# Altium PCB PCB1.PcbDoc
Units mm, origin at the board's own origin, x right, y up, seen from the top; angles counter-clockwise.
Board outline 102.72 x 28.35 mm, 2 copper layers (Top Layer, Bottom Layer), stack 0.533 mm thick; 35 components, 16 nets, 105 pads, 228 vias.
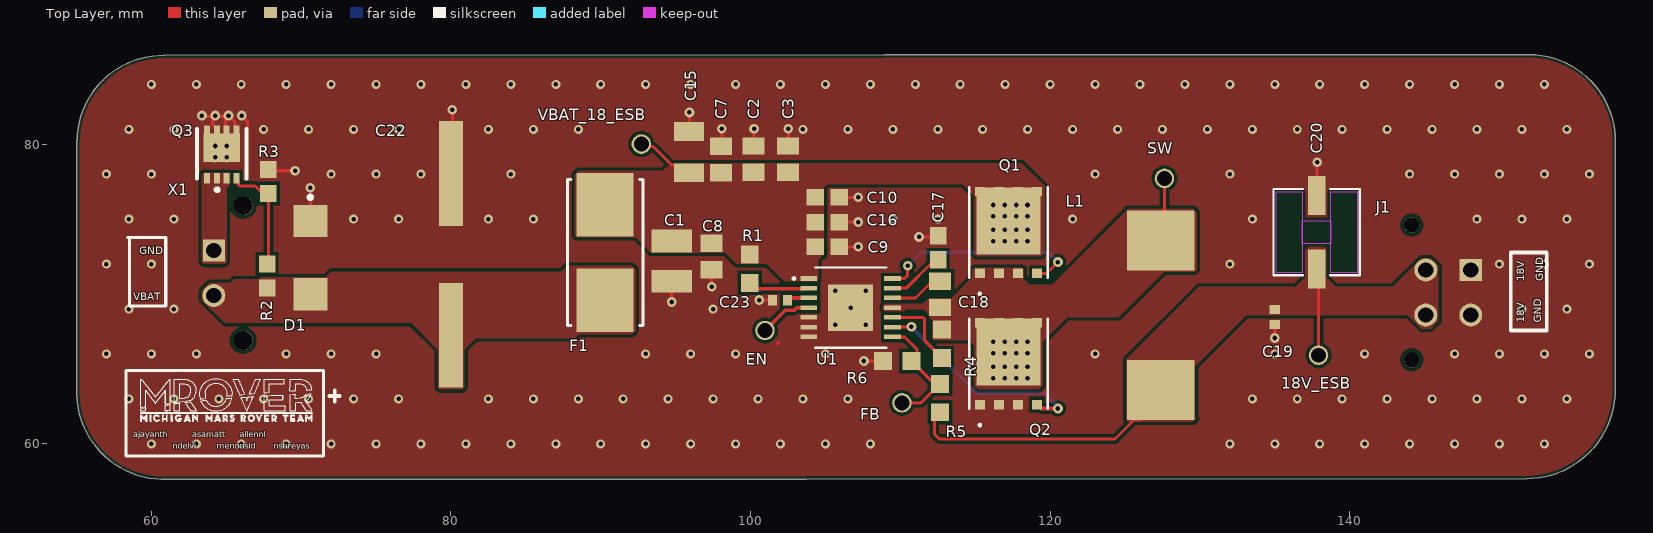
[diagram p0: Top Layer view]
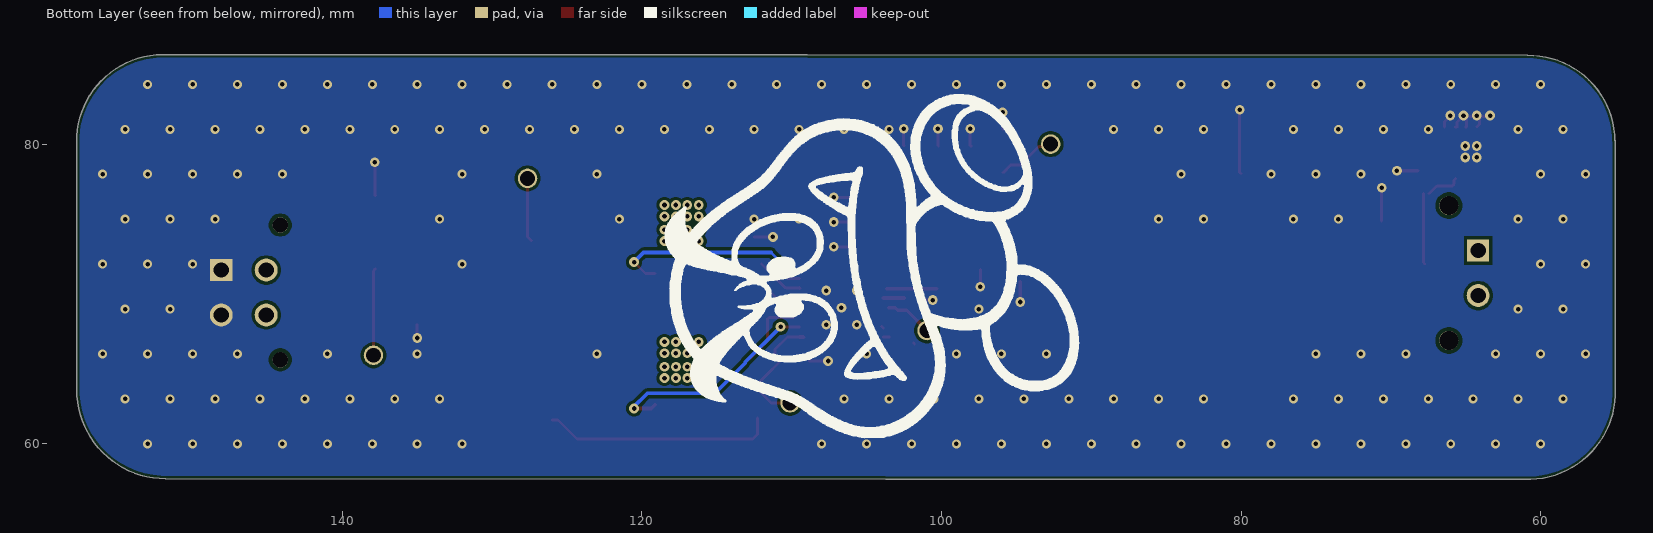
[diagram p1: Bottom Layer view, seen from below]

## Layer stack, top to bottom
Top Solder: solder mask 0.0102, Solder Resist, Dk 3.5
Top Layer: signal copper 0.0356
Dielectric 2: prepreg 0.0711, PP-006, Dk 4.1
Dielectric 1: dielectric 0.32, FR-4, Dk 4.8
Dielectric 3: prepreg 0.0711, PP-006, Dk 4.1
Bottom Layer: signal copper 0.0356
Bottom Solder: solder mask 0.0102, Solder Resist, Dk 3.5

## Board outline
60.664,57.625 cw(c60.853,63.464) 55.015,63.652 55.014,63.65 55.014,80.268 55.035,80.221 cw(c60.813,80.157) 60.876,85.935 108.966,85.979 152.019,85.979 cw(c151.956,80.2) 157.734,80.137 157.734,63.627 cw(c151.787,63.619) 151.794,57.672 151.816,57.67 103.726,57.626

## Design rules (kind name [scope] priority, off if disabled: settings)
BoardOutlineClearance [All] p1: gap=0.2 ignorepadtopadclearanceinfootprint=FALSE
Clearance "Stitching PGND_3" [IsStitchingVia and InNet('PGND') vs InNet('18V_ESB') or InNet('VBAT_18V_ESB') or InNet('VBAT_18_ESB') or InNet('SW')] p1: gap=0.2 ignorepadtopadclearanceinfootprint=FALSE
Clearance "Stitching PGND_2" [IsStitchingVia and InNet('PGND') vs InNet('18V_ESB') or InNet('VBAT_18V_ESB') or InNet('VBAT_18_ESB') or InNet('SW')] p2: gap=0.2 ignorepadtopadclearanceinfootprint=FALSE
Clearance "Stitching PGND_1" [IsStitchingVia and InNet('PGND') vs InNet('18V_ESB') or InNet('VBAT_18V_ESB') or InNet('VBAT_18_ESB') or InNet('SW')] p3: gap=0.2 ignorepadtopadclearanceinfootprint=FALSE
Clearance "Stitching PGND" [IsStitchingVia and InNet('PGND') vs InNet('18V_ESB') or InNet('VBAT_18V_ESB') or InNet('VBAT_18_ESB') or InNet('SW')] p4: gap=0.2 ignorepadtopadclearanceinfootprint=FALSE
Clearance "Stitching No Net_3" [IsStitchingVia and InNet('No Net') vs InNet('18V_ESB') or InNet('VBAT_18V_ESB') or InNet('VBAT_18_ESB') or InNet('SW')] p5: gap=0.2 ignorepadtopadclearanceinfootprint=FALSE
Clearance "Stitching No Net_2" [IsStitchingVia and InNet('No Net') vs InNet('18V_ESB') or InNet('VBAT_18V_ESB') or InNet('VBAT_18_ESB') or InNet('SW')] p6: gap=0.2 ignorepadtopadclearanceinfootprint=FALSE
Clearance "Stitching No Net_1" [IsStitchingVia and InNet('No Net') vs (IsVia and (Not IsStitchingVia)) Or IsPad] p7: gap=0.127 ignorepadtopadclearanceinfootprint=FALSE
Clearance "Stitching No Net" [IsStitchingVia and InNet('No Net') vs InNet('18V_ESB') or InNet('VBAT_18V_ESB') or InNet('VBAT_18_ESB')] p8: gap=0.2 ignorepadtopadclearanceinfootprint=FALSE
Clearance [All] p9: gap=0.203 ignorepadtopadclearanceinfootprint=FALSE except(0.25: Arc-Hole Track-Hole SMDPad-Hole THPad-Hole Via-Hole Fill-Hole Poly-Hole Region-Hole Text-Hole)
ComponentClearance [All] p1: gap=0.127 collisioncheckmode=3 verticalgap=0.127 showdistances=TRUE
DiffPairsRouting [All] p1: maxlimit=0.381 minlimit=0.203 mostfreqgap=0.203 toplayer_minwidth=0.203 toplayer_maxwidth=25.4 toplayer_prefwidth=0.203 bottomlayer_minwidth=0.203 bottomlayer_maxwidth=25.4 bottomlayer_prefwidth=0.203 maxuncoupledlength=12.7
Height [All] p1: minheight=0 maxheight=1816.048 prefheight=12.7
HoleSize [All] p1: absolutevalues=TRUE maxlimit=6.3 minlimit=0.3 maxpercent=80.000 minpercent=20.000
HoleToHoleClearance [All] p1: gap=0.25 allowstackedmicrovias=FALSE
MinimumAnnularRing [All] p1: minimumring=0.076
MinimumSolderMaskSliver [All] p1: minsoldermaskwidth=0
PlaneClearance [All] p1: clearance=0.203
PlaneConnect PlaneConnectPowerPads [InPadClass('PowerPads')] p1: planeconnectstyle=Direct reliefexpansion=0.508 reliefentries=4 reliefconductorwidth=0.254 reliefairgap=0.254
PlaneConnect [All] p2: pad.planeconnectstyle=Relief pad.reliefexpansion=0.3 pad.reliefentries=4 pad.reliefconductorwidth=0.203 pad.reliefairgap=0.203 via.planeconnectstyle=Direct via.reliefexpansion=0.3 via.reliefentries=4 via.reliefconductorwidth=0.127 via.reliefairgap=0.127
PolygonConnect PolygonConnectPowerPads [All vs (InPadClass('PowerPads'))] p1: connectstyle=Direct reliefconductorwidth=0.254 reliefentries=4 polygonreliefangle="90 Angle" airgapwidth=0.254
PolygonConnect [All] p2: connectstyle=Direct reliefconductorwidth=0.203 reliefentries=4 polygonreliefangle="90 Angle" airgapwidth=0.203
RoutingVias [All] p1: holewidth=0.3 width=0.6 viastyle="Through Hole" minholewidth=0.3 minwidth=0.6 maxholewidth=0.6 maxwidth=6.6
SilkToSilkClearance [All] p1: silktosilkclearance=0
SilkToSolderMaskClearance [IsPad] p1: minsilkscreentomaskgap=0.127 clearancetoexposedcopper=TRUE
SolderMaskExpansion [All] p1: expansion=0.075 istentingtop=FALSE
Width [All] p1: maxlimit=25.4 minlimit=0.203 preferedwidth=0.203 minimp=50.000000 maximp=50.000000 favimp=50.000000
20 further rules are at their usual default settings.

## Components (designator, comment, footprint, x,y, rotation, side; value= is the part's Value field where it differs from the comment)
18V_ESB "5003" TEST-POINT-0001 137.922,65.913 r0 top (schematic designator TP1)
C1 "CL32B106KBJNNNE" CAP-1210 94.742,72.192 r90 top
C2 "CC0805KKX7R9BB105" CAP-0805 100.203,79.003 r270 top
C3 "CC0805KRX7R9BB104" CAP-0805 102.489,79.003 r270 top
C7 "GRM2195C1H103JA01D" CAP-0805 98.022,78.985 r270 top
C8 "CDR01BX102BKUS7185" CAP-0805 97.409,72.508 r90 top
C9 "0603N101J101CT" CAP-0603 105.118,73.152 r180 top
C10 "0603N100J500CT" CAP-0603 105.118,76.454 r180 top
C15 "CL31B106KBHNNNE" CAP-1206 95.885,79.48 r90 top
C16 "CC0603KRX7R0BB104" CAP-0603 105.118,74.803 r0 top
C17 "UMK107BBJ225KA-T" CAP-0603 112.522,73.089 r90 top
C18 "KAM21KR72A474KL" CAP-0805 112.649,69.977 r90 top
C19 "0402B101K500NT" CAP-0402 135.001,68.461 r270 top
C20 "EEE-FK1H100UR" ELEC-10UF 137.946,73.877 r90 top
C22 "100SEV100M12.5X16" ELEC-100U-0001 80.01,72.644 r180 top
C23 "CC0402JRX7R9BB153" CAP-0402 101.981,69.596 r180 top
D1 "SMBJ40CA" "DO-214AA (SMBJ)" 70.612,72.39 r90 top
EN "5003" TEST-POINT-0001 100.965,67.564 r0 top (schematic designator TP5)
F1 "01550900M" FUSE-0001 90.297,72.771 r90 top
FB "5003" TEST-POINT-0001 110.109,62.738 r0 top (schematic designator TP3)
J1 "Molex 43045-0412" CONN-4POS-0002 148.082,70.104 r90 top
L1 "SRP1270-100M" PWRIND-10U-0002 127.381,68.58 r270 top
Q1 "CSD18563Q5A" 8-VSONP 117.221,74.109 r90 top
Q2 "CSD19534Q5A" 8-VSONP 117.221,65.346 r90 top
Q3 "CSD18543Q3AT" IC-8VSONCLIP 62.862,76.839 r0 top
R1 "RC0805FR-07274KL" RES-0805 99.949,71.689 r90 top
R2 "RC0603FR-07200KL" RES-0603 67.727,71.209 r90 top
R3 "RC0603FR-07100KL" RES-0603 67.818,77.508 r90 top
R4 "RC0805FR-071K18L" RES-0805 112.776,66.675 r90 top
R5 "RC0805FR-07287KL" RES-0805 112.649,63.058 r270 top
R6 "RC0805FR-079K76L" RES-0805 109.794,65.53 r0 top
SW "5003" TEST-POINT-0001 127.635,77.724 r0 top (schematic designator TP4)
U1 "LM3150" IC-14HTSSOP 106.68,69.088 r0 top
VBAT_18_ESB "5003" TEST-POINT-0001 92.71,80.01 r0 top (schematic designator TP2)
X1 "Molex 43650-0215" 43650-0215 64.171,71.402 r90 top

## Footprints (in the part's own frame and the unit in brackets; to place one, negate y for a bottom-side part, rotate by r counter-clockwise, add the part's x,y. Pads: shape width x height; smd on the part's side, far side on the other; paste and mask are expansions set on the pad)
8-VSONP [mm]
  rect 0.63x0.65 smd paste-0.1 mask-0.33: 1(-2.735,-1.905) 2(-2.735,-0.635) 2(-2.735,0.635) 2(-2.735,1.905) 3(2.735,-1.905) 3(2.735,-0.635) 3(2.735,0.635) 3(2.735,1.905)
  rect 4.46x4.29 smd paste+0 mask-0.33: 3(0.775,0)
  silkscreen extent -4.17,-2.63 3.03,2.63, body extent -3.03,-2.55 2.97,2.55, height 1.05
43650-0215 [mm]
  round 1.27 hole 1.27 unplated: 1(-4.5,-1.96) 1(4.5,-1.96)
  rect 1.482x1.482 / inner rect 1.524x1.524 / far side rect 1.482x1.482 hole 1.02: P$1(1.5,0)
  round 1.53 / inner round 1.524 / far side round 1.53 hole 1.02: P$2(-1.5,0)
  body extent -4.82,-2.47 4.83,3.14, height 10.03
CAP-0402 [mm]
  rect 0.6x0.7 smd: 1(-0.5,0) 2(0.5,0)
  body extent -0.5,-0.22 0.5,0.23, height 0.5
CAP-0603 [mm]
  rect 1.15x1.1 smd: 1(-0.8,0) 2(0.8,0)
  body extent -0.8,-0.45 0.8,0.45, height 0.8
CAP-0805 [mm]
  rect 1.16x1.47 smd: 1(-0.88,0) 2(0.88,0)
  body extent -1,-0.63 1,0.63, height 0.94
CAP-1206 [mm]
  rect 1.25x2 smd: 1(-1.375,0) 2(1.375,0)
  body extent -1.6,-0.8 1.6,0.8, height 1.5
CAP-1210 [mm]
  rect 1.53x2.72 smd: 1(-1.341,0) 2(1.341,0)
  body extent -1.6,-1.25 1.6,1.25, height 2.7
CONN-4POS-0002 [mm]
  round 1.02 hole 1.02 unplated: 1(-4.5,3.94) 1(4.5,3.94)
  rect 1.482x1.482 / inner rect 1.524x1.524 / far side rect 1.482x1.482 hole 1.02: 1(1.5,0)
  round 1.53 / inner round 1.524 / far side round 1.53 hole 1.02: 2(-1.5,0) 3(1.5,3) 4(-1.5,3)
  body extent -5.07,-2.45 5.08,6.32, height 10.03
"DO-214AA (SMBJ)" [mm]
  rect 2.16x2.26 smd: 1(-2.416,0) 2(2.484,0)
  silkscreen extent 3.94,-0.13 4.19,0.12, body extent -2.72,-1.95 2.78,1.95, height 2.45
ELEC-10UF [mil]
  rect 103x46 smd paste+0 mask+0: 1(-86.54,5.94) 2(106.46,5.94)
  Top Layer keep-out region: -20.67,-31.5 -20.67,44.29 40.35,44.29 40.35,-31.5
  Top Layer keep-out region: -96.54,44.29 -96.54,112.44 116.46,112.44 116.46,44.29
  Top Layer keep-out region: -96.54,-100.56 -96.54,-31.5 116.46,-31.5 116.46,-100.56
  silkscreen extent -104,-108 123,119, body extent -118,-103 138,114, height 242
ELEC-100U-0001 [mm]
  rect 1.6x7 smd: 1(0,5.4) 2(0,-5.4)
  silkscreen extent 7.45,9.08 8.13,9.82, body extent -6.6,-7.15 6.6,7.15, height 16.56
FUSE-0001 [mil]
  rect 167x150 smd paste+0 mask+0: 1(-125.5,0) 2(125.5,0)
  silkscreen extent -192,-99 192,99, body extent -213,-103 213,103, height 10
IC-8VSONCLIP [mm]
  rect 0.4x0.7 smd paste-100 mask+0.05: 1(2.812,0.877) 2(0.862,0.877) 2(1.512,0.877) 2(2.162,0.877) 3(0.862,4.077) 3(1.512,4.077) 3(2.162,4.077) 3(2.812,4.077)
  rect 2.45x1.9 smd paste-100 mask+0.05: 3(1.837,2.917)
  silkscreen extent 0.19,0.03 3.49,4.18, body extent 0.18,0.89 3.48,4.19, height 1.1
IC-14HTSSOP [mil]
  rect 44x12 smd paste-22: 1(-110,76.77) 2(-110,51.18) 3(-110,25.59) 4(-110,0) 5(-110,-25.59) 6(-110,-51.18) 7(-110,-76.77) 8(110,-76.77) 9(110,-51.18) 10(110,-25.59) 11(110,0) 12(110,25.59) 13(110,51.18) 14(110,76.77)
  rect 118x122 smd paste-61: 15(0,0)
  silkscreen extent -152,-106 94,106, body extent -126,-101 126,101, height 43
PWRIND-10U-0002 [mm]
  rect 4x4.5 smd: 1(-5,0) 2(5,0)
  body extent -6.85,-6.45 6.85,6.45, height 7.06
RES-0603 [mm]
  rect 1.15x1.1 smd: 1(-0.8,0) 2(0.8,0)
  body extent -0.8,-0.4 0.8,0.4, height 0.43
RES-0805 [mm]
  rect 1.2x1.2 smd: 1(-0.95,0) 2(0.95,0)
  body extent -1,-0.6 1,0.6, height 0.71
TEST-POINT-0001 [mm] "2024 miniature test point"
  round 1.3 hole 1: 1(0,0)
  body extent -1.27,-1.27 1.27,1.27, height 4.57

## Part data
18V_ESB EN FB SW VBAT_18_ESB: library part TEST-POINT-0001, "Oranange PC Test Point, Miniature Phoisphor Bronze Silver Plating Through Hole Mounting Type"
C1: library part CAP-10U-0002, "CAP CER 10UF 50V X7R 1210", Capacitance="10 uF", Voltage=50V, ComponentLink1Description=Datasheet, ComponentLink1URL=https://mm.digikey.com/Volume0/opasdata/d220001/medias/docus/41/CL32B106KBJNNNE_Spec.pdf, Device Class=Ceramic, Size=1210
C2: library part CAP-1U-0001, "CAP CER 1UF 50V X7R 0805", Capacitance="1.0 uF", Voltage="50 V", ComponentLink2Description=Datasheet, ComponentLink2URL=https://www.yageo.com/upload/media/product/productsearch/datasheet/mlcc/UPY-GPHC_X7R_6.3V-to-250V_24.pdf, Device Class=Ceramic, Size=0805
C3: library part CAP-0.1U-0002, "CAP CER 0.1UF 50V X7R 0805", Capacitance="100 nF", Voltage Rating="50 V", ComponentLink2Description=Datasheet, ComponentLink2URL=https://www.yageo.com/upload/media/product/productsearch/datasheet/mlcc/UPY-GPHC_X7R_6.3V-to-250V_24.pdf, Device Class=Ceramic, Size=0805
C7: library part CAP-10N-0001, "CAP CER 10000PF 50V C0G/NP0 0805", Capacitance=10nF, Voltage=50V, ComponentLink1Description=Datasheet, ComponentLink1URL=https://search.murata.co.jp/Ceramy/image/img/A01X/G101/ENG/GRM2195C1H103JA01-01.pdf, Device Class=Ceramic, Size=0805
C8: library part CAP-1N-0003, "1000 pF ±10% 100V Ceramic Capacitor BX 0805 (2012 Metric)", Capacitance="1 nF", Package Size=0805, Voltage Rating=100V
C9: library part CAP-100P-0002, "100 pF ±5% 100V Ceramic Capacitor C0G, NP0 0603 (1608 Metric)", Capacitance="100 pF", Package Size=0603, Temp Coeff=C0G/NP0, Tolerance=+/-5%, Voltage=100V
C10: library part CAP-10P-0001, "10 pF ±5% 50V Ceramic Capacitor C0G, NP0 0603 (1608 Metric)", Capacitance="10 pF +/- 5%", Manufacturer="Walshin Technology Corporation", Package Size=0603, Temperature Coefficient="C0G, NP0", Voltage Rating=50V, Assembled?=Yes, Manufacturer Part Number=0603N100J500CT
C15: library part CAP-10U-0001, "10 µF ±10% 50V Ceramic Capacitor X7R 1206 (3216 Metric)", Capacitance="10uF +/-20%", Manufacturer="Samsung Electro-Mechanics", Package Size=1206, Temperature Coefficient=X7R, Voltage Rating=50V, Assembled?=no, Manufacturer Part Number=CL31B106KBHNNNE
C16: library part CAP-100N-0001, "CAP CER 0.1UF 100V X7R 0603", Capacitance="100nF +/-10%", Manufacturer=YAGEO, Package Size=0603, Temperature Coefficient=X7R, Voltage Rating=100V, Assembled?=no, Manufacturer Part Number=CC0603KRX7R0BB104
C17: library part CAP-2.2U-0001, "2.2 µF ±10% 50V Ceramic Capacitor X5R 0603 (1608 Metric)", Capacitance="2.2 uF", oltage=50V
C18: library part CAP-0.47U-0001, "0.47 µF ±10% 100V Ceramic Capacitor X7R 0805 (2012 Metric)", Capacitance="0.47 uF", Package Size=0805, Temperature Coefficient=X7R, Tolerance="+/- 10%", Voltage=100V, Assembled?=No
C19: library part CAP-100P-0001-JLC, "50V 100pF X7R ±10% 0402 Multilayer Ceramic Capacitors MLCC - SMD/SMT ROHS", Capacitance="100 pF +/- 10%", JLC part number=C2991538, Voltage=50V, Assembled?=yes
C20: library part ELEC-10U-0001, "10 µF 50 V Aluminum Electrolytic Capacitors Radial, Can - SMD 2000 Hrs @ 105°C", Capacitance=10uF, Manufacturer=YAGEO, Manufacturer Part Number=RC0402FR-074K7P, Package Size=0402, Voltage=50V, Assembled?=no
C22: library part ELEC-100U-0001, "100 µF 100 V Aluminum Electrolytic Capacitors Radial, Can - SMD 2000 Hrs @ 85°C", Capacitance="100 uF", Manufacturer=Rubycon, Tolerance="+/- 20%", Voltage="100 V", Assembled?=No, ESR="idk check the datasheet i couldnt find it"
C23: library part CAP-15N-0001, "CAP CER 0.015UF 50V X7R 0402", Parameter 1=15nF, Parameter 2=50V
D1: library part DIO-TVS-0001, "TVS DIODE 40VWM 64.5VC DO214AA", Current Rating=9.3A, Voltage Rating=64.5V, ComponentLink1Description=Datasheet, ComponentLink1URL=https://www.littelfuse.com/media?resourcetype=datasheets&itemid=09a6ae9a-73cb-4ac4-acac-e6dab92ab953&filename=littelfuse_tvs_diode_smbj_datasheet.pdf
F1: library part FUSE-0001, "FUSE BLOK CARTRIDGE 125V 10A SMD", Fuse Current=8A, Voltage Rating=125V, ComponentLink2Description=Datasheet, ComponentLink2URL=https://www.littelfuse.com/~/media/electronics/datasheets/fuses/littelfuse_fuse_154_154t_154l_154tl_datasheet.pdf.pdf
J1: library part CONN-4POS-0002, "CONN HEADER VERT 4POS 3MM", ComponentLink1Description=Datasheet, ComponentLink1URL=https://www.molex.com/content/dam/molex/molex-dot-com/products/automated/en-us/salesdrawingpdf/430/43045/430450412_sd.pdf?inline
L1: library part PWRIND-10U-0002, "10 µH Shielded Drum Core, Wirewound Inductor 10 A 16.8mOhm Max Nonstandard", Inductance="10 uH", Tolerance="+/- 20%", Assembled?=No, DCI="10 A", DCR="16.8 mOhm", Isat=16A
Q1: library part NMOS-100A-0001, "MOSFET N-CH 60V 100A 8VSON", Manufacturer=Toshiba, Manufacturer Part Number=T2N7002AK,LM, Package=SOT-23-3, Assembled?=no, FET type=N-Channel, Id-Continuous=100A, Rds On-Max=3.9Ohm, VDS-Max=60V, Vgs-Max=20V
Q2: library part NMOS-50A-0001, "MOSFET N-CH 100V 50A 8VSON", Manufacturer=Toshiba, Manufacturer Part Number=T2N7002AK,LM, Package=SOT-23-3, Assembled?=no, FET type=N-Channel, Id-Continuous=50A, Rds On-Max=3.9Ohm, VDS-Max=100V, Vgs-Max=20V
Q3: library part NMOS-60A-0001, "MOSFET N-CH 60V 12A/60A 8VSON", Continuous Current=60A, Voltage=60V, ComponentLink2Description=Datasheet, ComponentLink2URL=http://www.ti.com/lit/ds/symlink/csd18543q3a.pdf
R1: library part RES-274k-0001, "274 kOhms ±1% 0.125W, 1/8W Chip Resistor 0805 (2012 Metric) Moisture Resistant Thick Film", Power=1/8W, Resistance=274k
R2: library part RES-200k-0001, "RES SMD 200K OHM 1% 1/10W 0603", Power=100mW, Resistance=200k, Tolerance=1%, ComponentLink1Description=Datasheet, ComponentLink1URL=https://www.yageo.com/upload/media/product/products/datasheet/rchip/PYu-RC_Group_51_RoHS_L_12.pdf, Size=0603
R3: library part RES-100k-0001, "RES SMD 100K OHM 1% 1/10W 0603", Power=100mW, Resistance=100k, Tolerance=1%, ComponentLink1Description=Datasheet, ComponentLink1URL=https://www.yageo.com/upload/media/product/products/datasheet/rchip/PYu-RC_Group_51_RoHS_L_12.pdf, Size=0603
R4: library part RES-1.18k-0001, "1.18 kOhms ±1% 0.125W, 1/8W Chip Resistor 0805 (2012 Metric) Moisture Resistant Thick Film", Power=1/8W, Resistance=1.18k
R5: library part RES-287k-0001, "287 kOhms ±1% 0.125W, 1/8W Chip Resistor 0805 (2012 Metric) Moisture Resistant Thick Film", Power=1/8W, Resistance=287k
R6: library part RES-9.76k-0001, "9.76 kOhms ±1% 0.125W, 1/8W Chip Resistor 0805 (2012 Metric) Moisture Resistant Thick Film", Power=1/8W, Resistance=9.76k
U1: library part IC-ESB-0001, "Buck Regulator Positive Output Step-Down DC-DC Controller IC 14-HTSSOP"
X1: library part "Micro-Fit Molex 2 Pin Vertical", Package=43650-0215, DeviceName=43650-0215, DeviceSetName=HEADER_POS2_?, GateName_1=G$1, LibraryName=con-molex-micro-fit-3_0_2, SymbolName_1=HEADER_POS2

## Via types
v1: diameter 0.6, hole 0.3, Top Layer to Bottom Layer, 162 vias
v2: diameter 0.65, hole 0.305, Top Layer to Bottom Layer, 66 vias

## Nets (pads, with @x,y where several pads share a name; then routed paths per layer and width w, separated by ;. In a path a pad name is that pad's centre, name@x,y a point inside that pad or via, vN(x,y) a via of type N, cw(c..) or ccw(c..) an arc to the next point about the centre after c; other vN are vias at no path point)
18V_ESB: 18V_ESB.1 C19.1 C20.1 J1.3 J1.4 L1.2 R5.2 | length 21.3
  Top Layer w0.203: R5.2@112.268,61.727 112.268,60.656 112.599,60.325 124.333,60.325 125.603,61.595 L1.2@125.984,61.595 ; C20.1 137.922,71.552 18V_ESB.1
BST: C18.2 U1.12 | length 3
  Top Layer w0.203: U1.12 111.013,69.738 C18.2@112.014,70.739
EN: EN.1 U1.4 | length 3.2
  Top Layer w0.254: EN.1@100.958,67.557 102.317,68.916 102.918,68.916 103.09,69.088 U1.4@103.505,69.088
FB: FB.1 R5.1 R6.2 U1.8 | length 7.7
  Top Layer w0.203: U1.8 110.281,67.138 111.125,66.294 R6.2@111.125,66.04 ; FB.1 111.379,62.738 R5.1 ; R6.2 111.758,64.516 111.76,64.516 R5.1@112.268,64.008
  Top Layer w0.254: U1.8@109.22,67.113 109.245,67.138 U1.8
HG: Q1.1 U1.14 | length 14.1
  Top Layer w0.203: U1.14 110.281,71.038 110.465,71.222 110.465,71.857 v2(110.49,71.882) ; Q1.1 119.761,71.374 v2(120.523,72.136)
  Bottom Layer w0.203: v2(110.49,71.882) 111.379,72.771
  Bottom Layer w0.254: 111.379,72.771 119.888,72.771 v2(120.523,72.136)
ILIM: R4.1 U1.10 | length 4.9
  Top Layer w0.203: U1.10@109.87,68.438 111.509,68.438 111.628,68.319 111.628,66.873 R4.1
LG: Q2.1 U1.9 | length 14.9
  Top Layer w0.203: U1.9 109.484,67.798 110.734,67.798 v2(110.744,67.808)
  Top Layer w0.254: Q2.1 119.38,62.357 v2(120.523,62.357)
  Bottom Layer w0.254: v2(110.744,67.808) 110.754,67.808 113.1,65.462 113.1,65.399 115.126,63.373 119.634,63.373 v2@120.587,62.42
NetQ3_1: Q3.1 R2.2 R3.1 | length 7.1
  Top Layer w0.203: Q3.1 65.772,77.618 65.772,77.335 65.891,77.216 66.929,77.216 R3.1@67.437,76.708 ; R2.2 67.818,72.1 R3.1
NetQ3_2: Q3.2 X1.P$1
PGND: C1.1 C2.1 C3.1 C7.1 C8.1 C9.1 C10.1 C15.2 C16.2 C17.2 C19.2 C20.2 C22.2 C23.2 D1.2 J1.1@148.082,71.604 J1.2 Q2.2 Q3.3 R3.2 R6.1 U1.5 U1.6 U1.7 U1.15 | length 30.4
  Top Layer w0.203: v2(63.373,81.915) 63.424,81.864 63.932,81.864 64.066,81.73 64.066,81.349 Q3.3@64.262,81.153 ; v2(64.262,81.915) 64.313,81.864 64.821,81.864 64.953,81.732 64.953,81.164 64.964,81.153 Q3.3@65.024,81.153 ; v2(65.151,81.915) 65.576,81.49 65.576,81.164 65.587,81.153 Q3.3@65.716,81.153 ; v2(66.04,81.915) 66.04,81.887 66.421,81.506 66.421,81.153 ; R3.2@68.199,78.232 v2(69.596,78.232) ; D1.2 v2(70.612,77.089) ; C22.2 80.095,78.129 v2(80.095,82.296) ; v2(94.742,69.469) C1.1 ; C15.2@95.885,80.982 95.921,81.018 v2(95.921,82.125) ; v2(97.409,70.485) C8.1 ; C7.1 98.08,79.924 v2(98.08,81.026) ; C2.1 100.239,79.919 v2(100.239,81.026) ; v2(100.584,69.596) C23.2 ; 101.803,66.675 101.854,66.726 ; C3.1 102.525,79.919 v2(102.525,81.026) ; U1.7@103.48,67.138 U1.7 ; U1.6@103.886,67.737 103.967,67.818 U1.6@104.013,67.818 ; C9.1@106.045,73.279 106.172,73.152 v2(107.188,73.152) ; C16.2@106.172,74.803 v2(107.188,74.803) ; C10.1@106.172,76.454 v2(107.188,76.454) ; v2(107.569,65.53) R6.1 ; v2(111.252,73.813) C17.2@112.522,73.813 ; v2(135.001,67.064) C19.2 ; C20.2 137.831,76.617 137.831,78.754 v2@137.795,78.791
  other v1: 60,60 63,60 66,60 69,60 72,60 75,60 78,60 81,60 84,60 87,60 90,60 93,60 96,60 99,60 102,60 105,60 108,60 132,60 135,60 138,60 141,60 144,60 147,60 150,60 153,60 58.5,63 61.5,63 64.5,63 67.5,63 70.5,63 73.5,63 76.5,63 82.5,63 85.5,63 88.5,63 91.5,63 94.5,63 97.5,63 100.5,63 103.5,63 106.5,63 133.5,63 136.5,63 139.5,63 142.5,63 145.5,63 148.5,63 151.5,63 154.5,63 57,66 60,66 63,66 69,66 72,66 75,66 93,66 96,66 99,66 105,66 123,66 135,66 141,66 147,66 150,66 153,66 156,66 58.5,69 61.5,69 97.5,69 151.5,69 154.5,69 57,72 60,72 132,72 150,72 153,72 156,72 58.5,75 61.5,75 73.5,75 76.5,75 82.5,75 85.5,75 109.5,75 112.5,75 121.5,75 133.5,75 148.5,75 151.5,75 154.5,75 57,78 60,78 72,78 75,78 78,78 84,78 123,78 132,78 144,78 147,78 150,78 153,78 156,78 58.5,81 61.5,81 67.5,81 70.5,81 73.5,81 76.5,81 82.5,81 85.5,81 88.5,81 103.5,81 106.5,81 109.5,81 112.5,81 115.5,81 118.5,81 121.5,81 124.5,81 127.5,81 130.5,81 133.5,81 136.5,81 139.5,81 142.5,81 145.5,81 148.5,81 151.5,81 154.5,81 60,84 63,84 66,84 69,84 72,84 75,84 78,84 81,84 84,84 87,84 90,84 93,84 96,84 99,84 102,84 105,84 108,84 111,84 114,84 117,84 120,84 123,84 126,84 129,84 132,84 135,84 138,84 141,84 144,84 147,84 150,84 153,84
  other v2: 105.664,67.945 107.696,67.945 106.68,69.088 105.664,70.231 107.696,70.231 137.831,78.791 64.262,79.121 65.024,79.121 64.262,79.883 65.024,79.883
RON: R1.1 U1.2 | length 3.3
  Top Layer w0.254: R1.1@100.33,70.358 U1.2@103.632,70.358
SS: C23.1 U1.3 | length 1.4
  Top Layer w0.254: C23.1@102.489,69.738 U1.3
SW: C18.1 L1.1 Q1.2 Q2.3 R4.2 SW.1 U1.11 | length 4.2
  Top Layer w0.203: L1.1 127.635,73.834 SW.1
  other v2: 116.205,64.389 116.967,64.389 117.729,64.389 118.491,64.389 116.205,65.151 116.967,65.151 117.729,65.151 118.491,65.151 116.205,66.04 116.967,66.04 117.729,66.04 118.491,66.04 116.205,66.802 116.967,66.802 117.729,66.802 118.491,66.802
VBAT_18_ESB: C1.2 C2.2 C3.2 C7.2 C8.2 C9.2 C10.2 C15.1 C16.1 F1.2 Q1.3 R1.2 U1.1 VBAT_18_ESB.1 | length 4
  Top Layer w0.203: VBAT_18_ESB.1 92.864,79.856 93.499,79.856 94.743,78.612 95.378,78.612 C15.1
  other v2: 116.205,73.533 116.967,73.533 117.729,73.533 118.491,73.533 116.205,74.295 116.967,74.295 117.729,74.295 118.491,74.295 116.205,75.184 116.967,75.184 117.729,75.184 118.491,75.184 116.205,75.946 116.967,75.946 117.729,75.946 118.491,75.946
VBAT_18V_ESB: C22.1 D1.1 F1.1 R2.1 X1.P$2
VCC: C17.1 U1.13 | length 3.2
  Top Layer w0.203: U1.13 110.393,70.388 C17.1@112.014,72.009
  Top Layer w0.254: U1.13 U1.13@109.499,70.413
pads on no net: J1.1@144.142,65.604 J1.1@144.142,74.604 X1.1

## Polygon pours and split planes (outlines as drawn)
PGND on Top Layer "PGND_L01_P043" (solid, remove dead copper, pour order 43): 60.664,57.625 cw(c60.853,63.464) 55.015,63.652 55.014,63.65 55.014,80.268 55.035,80.221 cw(c60.813,80.157) 60.876,85.935 108.966,85.979 152.019,85.979 cw(c151.956,80.2) 157.734,80.137 157.734,63.627 cw(c151.787,63.619) 151.794,57.672 151.816,57.67 103.726,57.626
SW on Top Layer "SW_L01_P039" (solid, pour order 39): 119.507,66.802 121.158,68.453 124.587,68.453 127.635,71.501 129.667,71.501 129.794,71.628 129.794,75.438 129.54,75.692 125.222,75.692 120.142,70.612 118.618,70.612 118.237,70.993 118.237,71.628 118.11,71.755 114.935,71.755 114.808,71.628 114.808,71.12 113.411,69.723 111.887,69.723 111.506,69.342 108.966,69.342 108.839,69.215 108.839,68.961 108.966,68.834 110.236,68.834 110.387,68.985 111.555,68.985 111.887,68.653 111.887,68.518 112.141,68.264 112.141,67.056 112.268,66.929 114.554,66.929 114.935,66.548 114.935,63.881 115.189,63.627 119.253,63.627 119.507,63.881
VBAT_18V_ESB on Top Layer "VBAT_18V_ESB_L01_P034" (solid, pour order 34): 64.897,68.072 77.343,68.072 79.121,66.294 79.121,63.754 79.248,63.627 80.772,63.627 80.899,63.754 80.899,66.294 81.661,67.056 88.265,67.056 88.519,67.31 92.075,67.31 92.329,67.564 92.329,71.628 92.075,71.882 87.757,71.882 87.376,71.501 72.009,71.501 71.628,71.12 67.31,71.12 67.183,70.993 65.532,70.993 65.278,70.739 63.881,70.739 63.373,70.231 63.373,69.596
VBAT_18_ESB on Top Layer "VBAT_18_ESB_L01_P038" (solid, pour order 38): 88.265,77.978 88.519,78.232 94.155,78.232 94.663,78.74 118.11,78.74 119.634,77.216 119.634,72.771 119.38,72.517 115.062,72.517 114.935,72.644 114.947,72.656 114.947,76.569 114.173,77.343 105.156,77.343 104.902,77.089 104.902,72.644 104.521,72.263 104.521,70.936 104.446,70.861 102.24,70.861 101.092,72.009 99.06,72.009 98.298,72.771 93.345,72.771 92.329,73.787 88.392,73.787 88.265,73.914
18V_ESB on Top Layer "18V_ESB_L01_P042" (solid, pour order 42): 125.095,61.595 125.222,61.468 129.528,61.468 129.756,61.696 129.667,61.786 129.667,65.151 133.096,68.58 143.891,68.58 144.78,67.691 145.415,67.691 145.923,68.199 145.923,71.882 145.415,72.39 144.78,72.39 142.875,70.485 139.065,70.485 138.43,71.12 138.43,73.025 138.303,73.152 137.287,73.152 137.033,72.898 137.033,71.12 136.398,70.485 129.921,70.485 125.095,65.659
NetQ3_2 on Top Layer "NETQ3_2_L01_P037" (solid, pour order 37): 63.5,78.105 63.373,77.978 63.373,72.136 63.5,72.009 64.897,72.009 65.024,72.136 65.024,77.089 65.278,77.343 65.278,78.042 65.215,78.105 65.151,78.105
PGND on Bottom Layer "PGND_L02_P044" (solid, remove dead copper, pour order 44): 60.664,57.625 cw(c60.853,63.464) 55.015,63.652 55.014,63.65 55.014,80.268 55.035,80.221 cw(c60.813,80.157) 60.876,85.935 108.966,85.979 152.019,85.979 cw(c151.956,80.2) 157.734,80.137 157.734,63.627 cw(c151.787,63.619) 151.794,57.672 151.816,57.67 103.726,57.626

## Silkscreen, mask and mechanical layers (free items; w line width, h text height)
Top Overlay:
  drawing of 2220 lines, arcs and shapes, not listed
  text "GND" at 59.182,72.644 h0.51
  text "18V" at 151.638,70.866 h0.51 r90
  text "GND" at 152.908,70.866 h0.51 r90
  text "VBAT" at 58.801,69.596 h0.51
  text "18V" at 151.638,68.072 h0.51 r90
  text "GND" at 152.781,68.072 h0.51 r90
  text "ajayanth" at 58.776,60.427 h0.38
  text "asamatt" at 62.713,60.427 h0.38
  text "allennl" at 65.888,60.427 h0.38
  text "ndelvi" at 61.443,59.665 h0.38
  text "menonsid" at 64.364,59.665 h0.38
  text "nshreyas" at 68.174,59.665 h0.38
Bottom Overlay:
  drawing of 2 lines, arcs and shapes, not listed
Mechanical 1:
  lines w0.254: 55.014,63.65 55.014,80.268 ; 55.015,63.652 ccw(c60.853,63.464) 60.664,57.625 ; 55.035,80.221 cw(c60.813,80.157) 60.876,85.935 108.966,85.979 152.019,85.979 cw(c151.956,80.201) 157.734,80.137 157.734,63.627 cw(c151.787,63.619) 151.794,57.672 ; 60.673,57.626 103.726,57.626 151.816,57.67
Top Component Center:
  lines w0.254: 117.219,61.468 116.586,61.468 116.332,61.722 117.983,61.722 ; 119.378,61.214 118.489,60.325 119.888,60.325 120.142,60.579